# EAGLE board Circuits-Diagram (EAGLE 9.7.0)

Size 356.83 x 455.62 mm. Coordinates in mm from the lower left corner, seen from the top.
Outline: 0,0 356.83,0 356.83,455.62 0,455.62 0,0
Copper layers (1*16): Top 0.035mm / dielectric 1.5mm / Bottom 0.035mm
Design rules "default": minimum track width 6mil, minimum drill 0.35mm, track to track 6mil, track to pad 6mil, pad to pad 6mil, via to via 6mil, smd to smd 6mil, copper to edge 40mil, drill to drill 6mil, minimum pad ring 10mil, minimum via ring 8mil, stop-mask expansion 4mil, vias tented up to drill 0mil, thermal gap 10mil

## Footprints (pad centres in the part's own frame; a part is rotated, then mirrored left to right if it is on the bottom)
LEDRD254W60D565H860B = drill 0.981 pad 1.581: 1 -1.27,0; 2 1.27,0
28027 = drill 1.016 long: 1 -2.54,0; 2 0,0; 3 2.54,0
RESAD1016W63L850D250B = drill 0.83 pad 1.43: 1 -5.08,0; 2 5.08,0
GL5528 = drill 0.8 pad 1.4: 1 -1.702,0; 2 1.702,0
SG90 = drill 1.016 long: 1 -2.54,0; 2 0,0; 3 2.54,0
ARDUINO-UNO-R3-SHIELD = drill 1.016 pad 1.88: 3.3V 24.13,-2.54; 5V 24.13,0; A0 24.13,12.7; A1 24.13,15.24; A2 24.13,17.78; A3 24.13,20.32; A4 24.13,22.86; A5 24.13,25.4; AREF -24.13,-13.97; D2 -24.13,20.32; D3 -24.13,17.78; D4 -24.13,15.24; D5 -24.13,12.7; D6 -24.13,10.16; D7 -24.13,7.62; D8 -24.13,3.81; D9 -24.13,1.27; D10 -24.13,-1.27; D11 -24.13,-3.81; D12 -24.13,-6.35; D13 -24.13,-8.89; GND@0 24.13,2.54; GND@1 24.13,5.08; GND@2 -24.13,-11.43; IOREF 24.13,-7.62; NC 24.13,-10.16; RES 24.13,-5.08; RX -24.13,25.4; SCL -24.13,-19.05; SDA -24.13,-16.51; TX -24.13,22.86; VIN 24.13,7.62
LCD-I2C = drill 1.016 long: 1 -19.05,-5.08; 2 -19.05,-7.62; 3 -19.05,-10.16; 4 -19.05,-12.7

## Placement (x,y rotation side)
D2  RED  [LEDRD254W60D565H860B]  348.18,160.73 180 top
D3  RED  [LEDRD254W60D565H860B]  61.71,142.58 180 top
D4  RED  [LEDRD254W60D565H860B]  61.71,268.1 180 top
PIR1  PIR-SENSOR_28027  [28027]  20.95,153.05 0 top
PIR2  PIR-SENSOR_28027  [28027]  193.92,154.99 0 top
PIR3  PIR-SENSOR_28027  [28027]  346.79,263.06 270 top
PIR4  PIR-SENSOR_28027  [28027]  347.93,197.44 270 top
PIR5  PIR-SENSOR_28027  [28027]  349.54,132.03 270 top
PIR6  PIR-SENSOR_28027  [28027]  350.48,65.42 270 top
R2  10k  [RESAD1016W63L850D250B]  134.56,449.29 0 top
R3  220  [RESAD1016W63L850D250B]  152.34,444.21 90 top
R6  PHOTOCELL_GL5528  [GL5528]  122.03,265.27 0 top
SERVO1  SERVOSG90  [SG90]  109.73,130.73 180 top
U1  ARDUINO-UNO-R3-SHIELD  [ARDUINO-UNO-R3-SHIELD]  110.31,47.88 0 top
U2  LCD-16X2-I2CSUNFOUNDER-IIC  [LCD-I2C]  102.62,252.68 0 top

## Library data of the parts
D2-D4 = Tinkercad; CATEGORY: Opto-Electronic; SUB-CATEGORY: LED; VALUE: LED_RED
PIR1-PIR6 R2 R3 R6 SERVO1 U1 U2 = Tinkercad

## Nets
D4_A: D2.1 D3.1 D4.1 R3.2
U1_5V: PIR1.2 PIR2.2 PIR3.2 PIR4.2 PIR5.2 PIR6.2 R6.1 SERVO1.2 U1.5V U2.2
U1_A0: R2.1 R6.2 U1.A0
U1_D2: PIR3.1 U1.D2
U1_D3: PIR4.1 U1.D3
U1_D4: PIR2.1 U1.D4
U1_D5: PIR5.1 U1.D5
U1_D6: PIR6.1 U1.D6
U1_D7: PIR1.1 U1.D7
U1_D9: SERVO1.3 U1.D9
U1_D12: R3.1 U1.D12
U1_GND: D2.2 D3.2 D4.2 PIR1.3 PIR2.3 PIR3.3 PIR4.3 PIR5.3 PIR6.3 R2.2 SERVO1.1 U1.GND@0 U1.GND@1 U1.GND@2 U2.1
U1_SCL: U1.SCL U2.4
U1_SDA: U1.SDA U2.3

## Tracks (layer width: path | path; a pad name or v marks a point on that pad's centre or on a via)
D4_A  (3 unrouted)
U1_5V  (9 unrouted)
U1_A0  (2 unrouted)
U1_D2  (1 unrouted)
U1_D3  (1 unrouted)
U1_D4  (1 unrouted)
U1_D5  (1 unrouted)
U1_D6  (1 unrouted)
U1_D7  (1 unrouted)
U1_D9  (1 unrouted)
U1_D12  (1 unrouted)
U1_GND  (14 unrouted)
U1_SCL  (1 unrouted)
U1_SDA  (1 unrouted)